# Altium PCB 01SignalDetect.PcbDoc
Units mil, origin at the board's own origin, x right, y up, seen from the top; angles counter-clockwise.
Board outline 5526.23 x 3781.16 mil, 2 copper layers (Top Layer, Bottom Layer); 124 components, 62 nets, 362 pads, 129 vias.
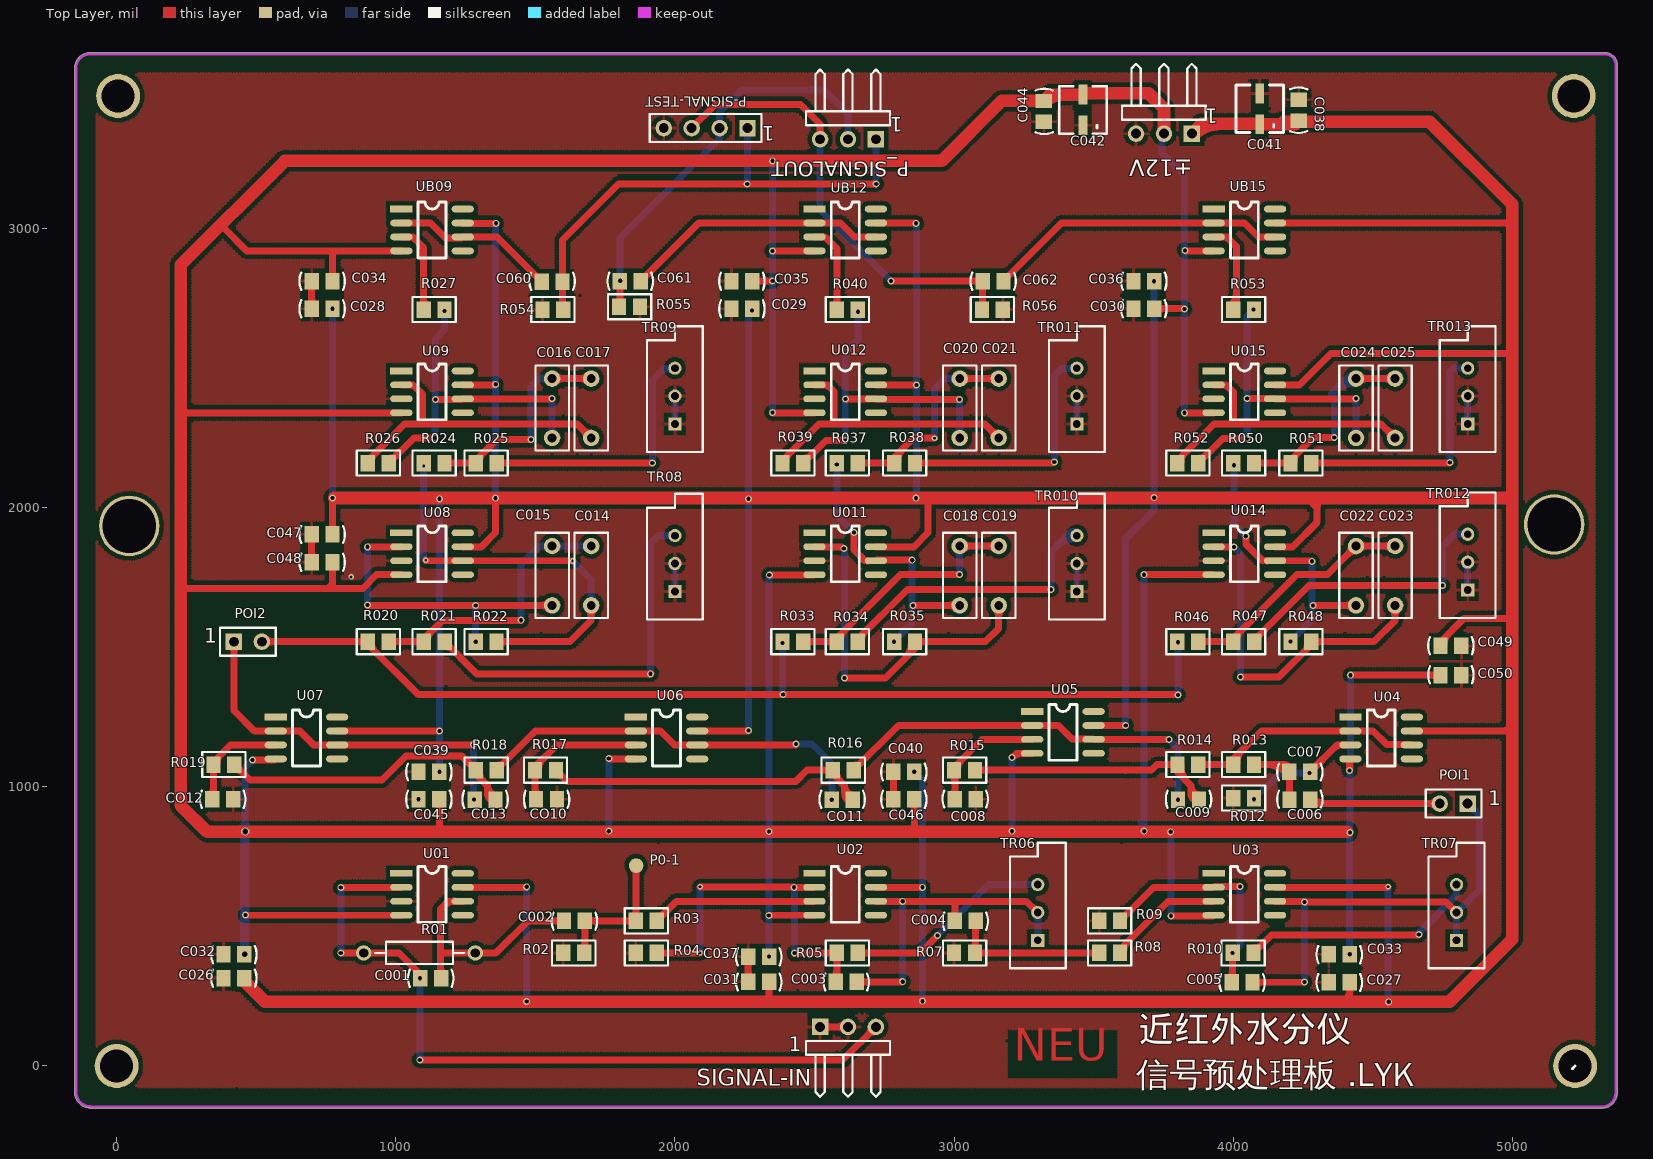
[diagram p0: Top Layer view]
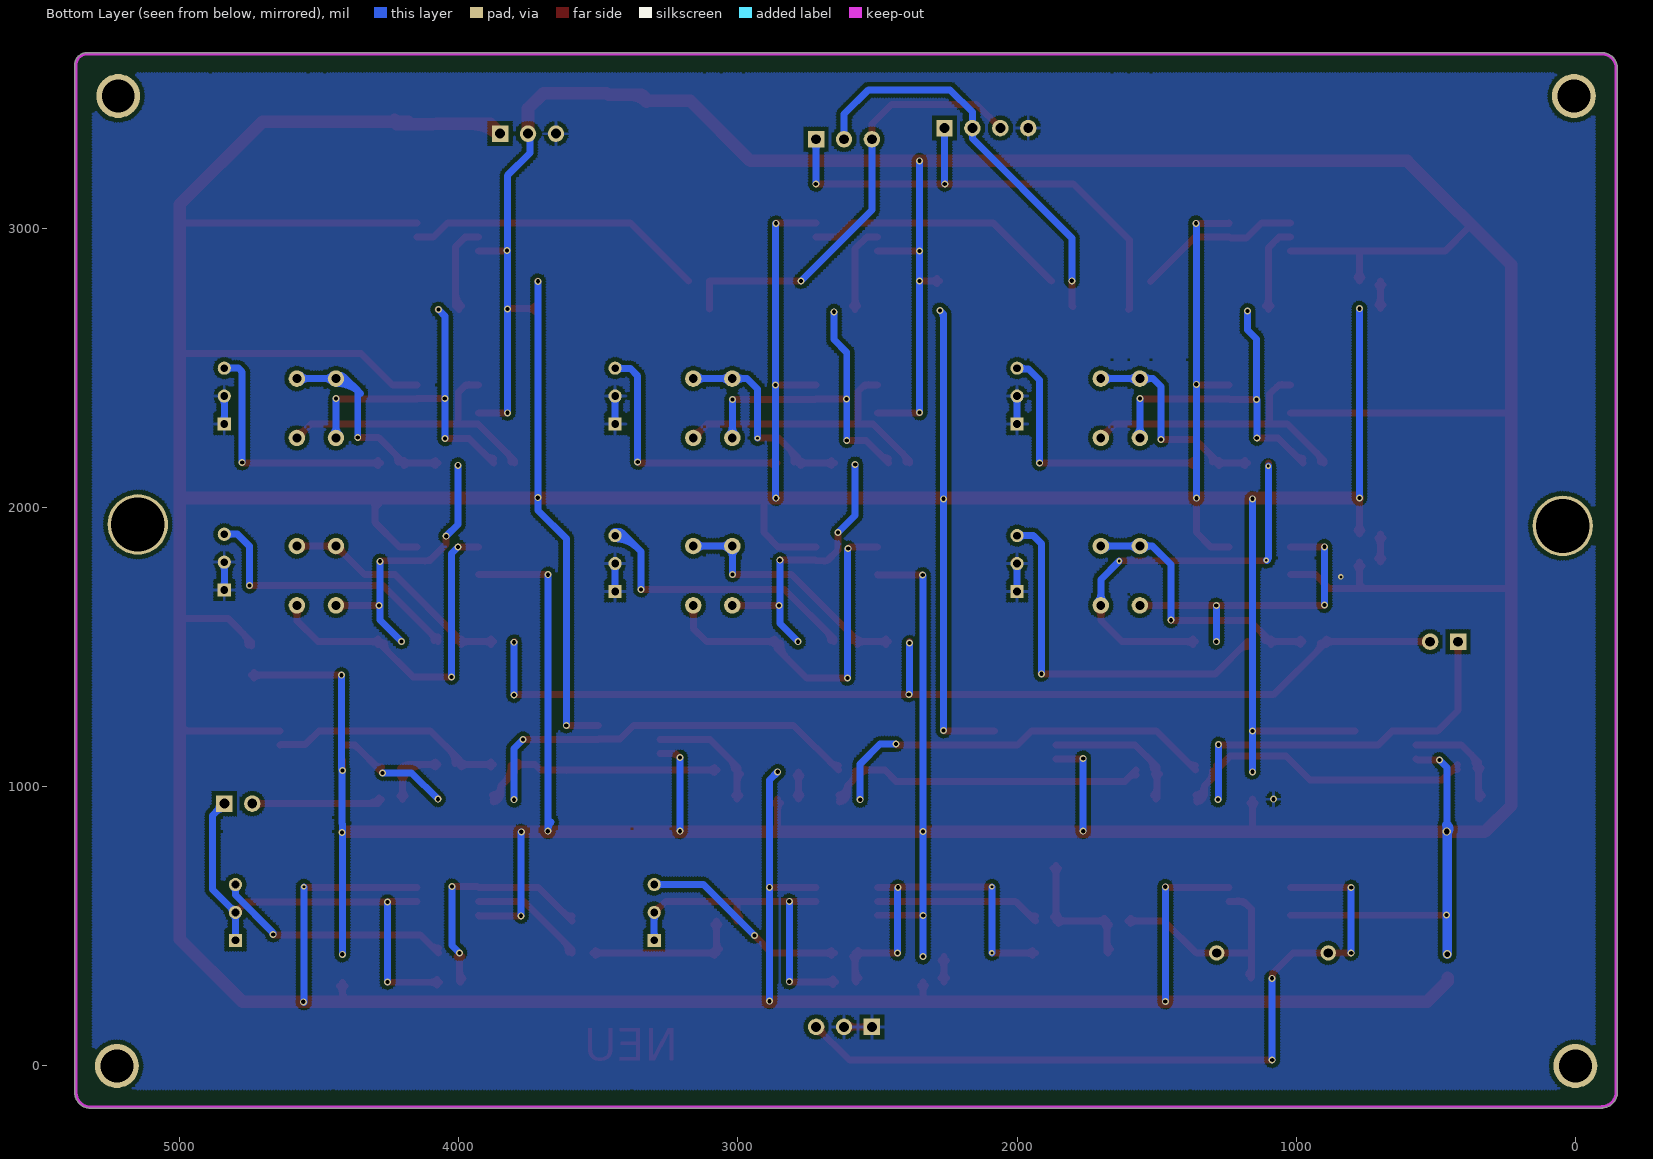
[diagram p1: Bottom Layer view, seen from below]

## Layer stack, top to bottom
Top Layer: signal copper 1.4
Dielectric: dielectric 12.6, FR-4, Dk 4.8
Bottom Layer: signal copper 1.4

## Board outline
-149.99,-100.25 ccw(c-95,-94.75) -98.28,-149.92 ccw(c-95,-146.13) -95,-151.14 5325,-151.14 ccw(c5325,-146.13) 5325.55,-151.11 ccw(c5320,-96.13) 5375.27,-96.13 ccw(c5370.25,-96.13) 5375.27,-96.03 5375.96,3589.41 ccw(c5370.95,3589.49) 5375.96,3589.49 ccw(c5370.95,3589.49) 5375.94,3589.99 ccw(c5331.71,3585.57) 5331.71,3630.02 -100,3630.02 ccw(c-100,3625) -100.5,3629.99 ccw(c-95,3575) -150.26,3575 ccw(c-145.25,3575) -150.02,3573.44 -150.02,-99.75 ccw(c-145,-99.75)

## Design rules (kind name [scope] priority, off if disabled: settings)
Clearance Clearance_2 [InNamedPolygon('Top Layer-b')] p1: gap=15
Clearance Clearance_1 [InNamedPolygon('Top Layer-r')] p2: gap=15
Clearance [All] p3: gap=8
HoleSize [All] p1: absolutevalues=TRUE maxlimit=500 minlimit=1 maxpercent=80.000 minpercent=20.000
HoleToHoleClearance [All] p1: gap=8 allowstackedmicrovias=TRUE
MinimumSolderMaskSliver [All] p1: minsoldermaskwidth=8
PolygonConnect [All] p1: connectstyle=Relief reliefconductorwidth=10 reliefentries=4 polygonreliefangle="90 Angle"
RoutingCorners [All] p1: cornerstyle=45-Degree minsetback=10 maxsetback=100
RoutingVias [All] p1: holewidth=10 width=20 viastyle="Through Hole" minholewidth=8 minwidth=10 maxholewidth=50 maxwidth=80
SilkToSilkClearance [All] p1: silktosilkclearance=8
SilkscreenOverComponentPads [All] p1: minsilkscreentomaskgap=5
SolderMaskExpansion [All] p1: expansion=4
TestPointUsage [All] p1: valid=0 allowmultiple=FALSE
Testpoint [All] p1: side=15 testpointundercomponent=TRUE minsize=40 maxsize=100 preferedsize=60 minholesize=0 maxholesize=40 preferedholesize=32 testpointgrid=1 style=1023 order=0-112345678
Width [All] p1: maxlimit=100 minlimit=10 preferedwidth=20
18 further rules are at their usual default settings.

## Components (designator, comment, footprint, x,y, rotation, side; value= is the part's Value field where it differs from the comment)
C001 "Cap" CC0805 1125,315 r180 top
C002 "Cap" CC0805 1640,520 r180 top
C003 "Cap" CC0805 2613.62,301.72 r180 top
C004 "Cap" CC0805 3040,520 r180 top
C005 "Cap" CC0805 4031.78,300 r180 top
C006 "Cap" CC0805 4238.78,954 r0 top
C007 "Cap" CC0805 4238.62,1054 r180 top
C008 "Cap" CC0805 3040,955.72 r0 top
C009 "Cap" CC0805 3840,954 r0 top
C013 "Cap" CC0805 1320,954 r0 top
C014 "Cap" 校正电容 1700,1650 r90 top
C015 "Cap" 校正电容 1560,1650 r90 top
C016 "Cap" 校正电容 1560,2250 r90 top
C017 "Cap" 校正电容 1700,2250 r90 top
C018 "Cap" 校正电容 3020,1650 r90 top
C019 "Cap" 校正电容 3160,1650 r90 top
C020 "Cap" 校正电容 3020,2250 r90 top
C021 "Cap" 校正电容 3160,2250 r90 top
C022 "Cap" 校正电容 4440,1650 r90 top
C023 "Cap" 校正电容 4580,1650 r90 top
C024 "Cap" 校正电容 4440,2250 r90 top
C025 "Cap" 校正电容 4580,2250 r90 top
C026 "Cap" CC0805 420,315 r180 top
C027 "Cap" CC0805 4380,300 r180 top
C028 "Cap" CC0805 736,2713 r180 top
C029 "Cap" CC0805 2240,2713 r180 top
C030 "Cap" CC0805 3680,2812 r180 top
C031 "Cap" CC0805 2300,301.72 r180 top
C032 "Cap" CC0805 420,400 r180 top
C033 "Cap" CC0805 4380,400 r180 top
C034 "Cap" CC0805 736,2812 r180 top
C035 "Cap" CC0805 2240,2812 r180 top
C036 "Cap" CC0805 3680,2713 r180 top
C037 "Cap" CC0805 2300,391.72 r180 top
C038 "Cap" CC0805 4235,3424.17 r90 top
C039 "Cap" CC0805 1118.62,1054 r180 top
C040 "Cap" CC0805 2820,1054 r180 top
C041 "Cap Pol1" "4*4.5 贴片电解电容" 4095,3484 r0 top
C042 "Cap Pol1" "4*4.5 贴片电解电容" 3462,3480 r0 top
C044 "Cap" CC0805 3322,3420 r270 top
C045 "Cap" CC0805 1118.62,955.72 r180 top
C046 "Cap" CC0805 2820,955.72 r180 top
C047 "Cap" CC0805 736,1905 r180 top
C048 "Cap" CC0805 736.17,1805 r180 top
C049 "Cap" CC0805 4780,1505 r0 top
C050 "Cap" CC0805 4780,1400 r0 top
C060 "Cap" CC0805 1560,2810.28 r0 top
C061 "Cap" CC0805 1840,2812 r180 top
C062 "Cap" CC0805 3140,2812 r180 top
CO10 "Cap" CC0805 1540,955.72 r180 top
CO11 "Cap" CC0805 2599.24,954 r0 top
CO12 "Cap" CC0805 380,955.72 r180 top
P0-1 "测试点" Text_PAD 1860,720 r90 top
P-SIGNAL-TEST "信号处理输出测试点" HDR1X4 2260,3360 r180 top
P_SIGNALOUT "信号处理输出" HDR1X3H 2720,3320 r180 top
POI1 "FAMP_OUT-FILTER_IN跳针" HDR1X2 4840,940 r180 top
POI2 "FILTER_OUT-PART_IN跳针" HDR1X2 420,1520 r0 top
R01 "Res2" AXIAL-0.4 1085,405 r0 top
R02 "Res2" 0805 1600,405 r0 top
R03 "Res2" 0805 1860,520 r0 top
R04 "Res2" 0805 1860,405 r0 top
R05 "Res2" 0805 2580,405 r0 top
R07 "Res2" 0805 3000,405 r0 top
R08 "Res2" 0805 3520,405 r0 top
R09 "Res2" 0805 3520,520 r0 top
R010 "Res2" 0805 3998,405 r0 top
R012 "Res2" 0805 4000,960 r0 top
R013 "Res2" 0805 4000,1080 r0 top
R014 "Res2" 0805 3875,1080 r180 top
R015 "Res2" 0805 3000,1060 r0 top
R016 "Res2" 0805 2640.46,1060 r180 top
R017 "Res2" 0805 1573.78,1060 r180 top
R018 "Res2" 0805 1361.22,1060 r180 top
R019 "Res2" 0805 421.38,1080 r180 top
R020 "Res2" 0805 900,1520 r0 top
R021 "Res2" 0805 1175,1520 r180 top
R022 "Res2" 0805 1286.22,1520 r0 top
R024 "Res2" 0805 1100,2160 r0 top
R025 "Res2" 0805 1361.22,2160 r180 top
R026 "Res2" 0805 900,2160 r0 top
R027 "Res2" 0805 1100,2710 r0 top
R033 "Res2" 0805 2385,1520 r0 top
R034 "Res2" 0805 2655,1520 r180 top
R035 "Res2" 0805 2860,1520 r180 top
R037 "Res2" 0805 2580,2160 r0 top
R038 "Res2" 0805 2860,2160 r180 top
R039 "Res2" 0805 2385,2160 r0 top
R040 "Res2" 0805 2580,2710 r0 top
R046 "Res2" 0805 3800,1520 r0 top
R047 "Res2" 0805 4075,1520 r180 top
R048 "Res2" 0805 4280,1520 r180 top
R050 "Res2" 0805 4000,2160 r0 top
R051 "Res2" 0805 4280,2160 r180 top
R052 "Res2" 0805 3800,2160 r0 top
R053 "Res2" 0805 4000,2710 r0 top
R054 "Res2" 0805 1600,2710 r180 top
R055 "Res2" 0805 1800,2720 r0 top
R056 "Res2" 0805 3100,2710 r0 top
SIGNAL-IN "探测器信号输入" HDR1X3H 2520,140 r0 top
TR06 "RPot" VR5 3300.06,550 r90 top
TR07 "RPot" VR5 4800.06,550 r90 top
TR08 "RPot" VR5 2000,1800 r90 top
TR09 "RPot" VR5 2000,2400 r90 top
TR010 "RPot" VR5 3440.06,1800 r90 top
TR011 "RPot" VR5 3440,2400 r90 top
TR012 "RPot" VR5 4840,1805 r90 top
TR013 "RPot" VR5 4840,2400 r90 top
U01 "AD8671" SO-8-N 1020,690 r0 top
U02 "OP37EZ" SO-8-N 2500,690 r0 top
U03 "OP37EZ" SO-8-N 3930,690 r0 top
U04 "OP37EZ" SO-8-N 4420,1250 r0 top
U05 "OP37EZ" SO-8-N 3280,1270 r0 top
U06 "OP37EZ" SO-8-N 1860,1250 r0 top
U07 "OP37EZ" SO-8-N 570,1250 r0 top
U08 "OP37EZ" SO-8-N 1020,1910 r0 top
U09 "OP37EZ" SO-8-N 1020,2490 r0 top
U011 "OP37EZ" SO-8-N 2500,1910 r0 top
U012 "OP37EZ" SO-8-N 2500,2490 r0 top
U014 "OP37EZ" SO-8-N 3930,1910 r0 top
U015 "OP37EZ" SO-8-N 3930,2490 r0 top
UB09 "OP37EZ" SO-8-N 1020,3070 r0 top
UB12 "OP37EZ" SO-8-N 2500,3070 r0 top
UB15 "OP37EZ" SO-8-N 3930,3070 r0 top
±12V "信号处理板连接" HDR1X3H 3852,3340 r180 top

## Footprints (in the part's own frame and the unit in brackets; to place one, negate y for a bottom-side part, rotate by r counter-clockwise, add the part's x,y. Pads: shape width x height; smd on the part's side, far side on the other; paste and mask are expansions set on the pad)
"4*4.5 贴片电解电容" [mm] "10uf-16V / 25V铝电解电容"
  rect 0.8x1.8 smd: 1(0,-2.794) 2(0,0)
  silkscreen extent -2.16,-3.56 2.16,0.76
0805 [mm]
  rect 1.3x1.5 smd: 1(0,0) 2(1.9,0)
  silkscreen extent -1.02,-1.14 2.92,1.14
AXIAL-0.4 [mm] "Resistor; 2 Leads"
  round 1.4 hole 0.85: 1(-5.08,0) 2(5.08,0)
  silkscreen extent -4.06,-1.02 4.06,1.02
CC0805 [mm] "贴片电容"
  rect 1.3x1.5 smd: 1(-0.95,0) 2(0.95,0)
  silkscreen extent -2.06,-0.76 2.06,0.81, body extent -1.27,-0.64 1.27,0.64, height 0.9
HDR1X2 [mm] "Connector; Header; 2 Position"
  rect 1.5x1.5 hole 0.9: 1(0,0)
  round 1.5 hole 0.9: 2(2.54,0)
  silkscreen extent -1.27,-1.27 3.81,1.27
HDR1X3H [mm] "Connector; Header; 3 Position; Right Angle"
  rect 1.5x1.5 hole 0.9: 1(0,0)
  round 1.5 hole 0.9: 2(2.54,0) 3(5.08,0)
  silkscreen extent -1.27,-6.35 6.35,-1.27
HDR1X4 [mm] "Connector; Header; 4 Position"
  rect 1.5x1.5 hole 0.9: 1(0,0)
  round 1.5 hole 0.9: 2(2.54,0) 3(5.08,0) 4(7.62,0)
  silkscreen extent -1.27,-1.27 8.89,1.27
SO-8-N [mil]
  rect 80x24 smd: 1(0,0)
  oval 80x24 smd: 2(0,-50) 3(0,-100) 4(0,-150) 5(220,-150) 6(220,-100) 7(220,-50) 8(220,0)
  silkscreen extent 60,-175 160,25
Text_PAD [mil]
  round 52.13 smd: 0(-2,-1)
VR5 [mm] "Potentiometer; 3 Leads"
  rect 1.2x1.2 hole 0.7: 1(-2.54,0)
  round 1.2 hole 0.7: 2(0,0) 3(2.54,0)
  silkscreen extent -5.08,-2.54 6.35,2.54
校正电容 [mm]
  round 1.5 hole 0.8: 1(0,0) 2(5.4,0)
  silkscreen extent -1.14,-1.52 6.6,1.52

## Part data
C001 C002 C003 C004 C005 C006 C007 C008 C009 C013 C014 C015 C016 C017 C018 C019 C020 C021 C022 C023 C024 C025 C026 C027 C028 C029 C030 C031 C032 C033 C034 C035 C036 C037 C038 C039 C040 C044 C045 C046 C047 C048 C049 C050 C060 C061 C062 CO10 CO11 CO12: "Capacitor"
C041 C042: "Polarized Capacitor (Radial)"
P-SIGNAL-TEST: library part "Header 4", "Header, 4-Pin"
P_SIGNALOUT SIGNAL-IN ±12V: library part "Header 3H", "Header, 3-Pin, Right Angle"
POI1 POI2: library part "Header 2", "Header, 2-Pin"
R01 R02 R03 R04 R05 R07 R08 R09 R010 R012 R013 R014 R015 R016 R017 R018 R019 R020 R021 R022 R024 R025 R026 R027 R033 R034 R035 R037 R038 R039 R040 R046 R047 R048 R050 R051 R052 R053 R054 R055 R056: "Resistor"
TR06 TR07 TR08 TR09 TR010 TR011 TR012 TR013: "Potentiometer"
U01: library part OP27FJ, "Low-Noise, Precision Operational Amplifier"
U02 U03 U04 U05 U06 U07 U08 U09 U011 U012 U014 U015 UB09 UB12 UB15: "Low-Noise, Precision, High-Speed Operational Amplifier (Avcl >= 5)"

## Free pads (board coordinates)
  round 157.48 hole 118.11: 0(0,0) 1(5,3475) 2(5225,0) 3(5220,3475)
  round 216.54 hole 192.91: 4(45,1935) 5(5150,1940)

## Via types
v1: diameter 25, hole 15, Top Layer to Bottom Layer, 119 vias
v2: diameter 20, hole 10, Top Layer to Bottom Layer, 8 vias
v3: diameter 30, hole 20, Top Layer to Bottom Layer, 2 vias

## Nets (pads, with @x,y where several pads share a name; then routed paths per layer and width w, separated by ;. In a path a pad name is that pad's centre, name@x,y a point inside that pad or via, vN(x,y) a via of type N, cw(c..) or ccw(c..) an arc to the next point about the centre after c; other vN are vias at no path point)
AGND: C008.2 C026.2 C027.2 C028.2 C029.2 C030.2 C031.2 C032.2 C033.2 C034.2 C035.2 C036.2 C037.2 C038.2 C039.2 C040.2 C041.2 C042.1 C044.2 C045.2 C046.2 C047.2 C048.2 C049.2 C050.2 CO10.1 CO12.1 P-SIGNAL-TEST.4 R02.1 R04.1 R07.1 R09.1 R012.1 R054.2 R055.2 R056.2 SIGNAL-IN.1 SIGNAL-IN.2 TR08.1 TR08.2 TR09.1 TR09.2 TR010.1 TR010.2 TR011.1 TR011.2 TR012.1 TR012.2 TR013.1 TR013.2 U01.3 U08.3 U09.3 U011.3 U012.3 U014.3 U015.3 ±12V.3 | length 2141.9
  Top Layer w10: v2(840,1752) v2@840,1760
  Top Layer w25: C047.2@689.34,1891.81 cw(c666.99,1869.46) 698.6,1869.46 cw(c730.2,1869.46) C047.2@707.85,1891.81 ; C028.2@689.34,2726.19 ccw(c666.99,2748.54) 698.6,2748.54 ccw(c730.2,2748.54) C028.2@707.85,2726.19 ; C034.2@689.34,2798.81 cw(c666.99,2776.46) 698.6,2776.46 cw(c730.2,2776.46) C034.2@707.85,2798.81 ; C048.2@689.51,1818.19 ccw(c667.57,1840.14) 698.6,1840.14 ; 698.6,1840.94 ccw(c730.77,1840.94) C048.2@708.02,1818.19 ; C047.2 698.6,1805.17 C048.2 ; C028.2 C034.2 ; TR08.2 TR08.2@2010,1810 ; C031.2@2253.34,314.91 ccw(c2230.99,337.26) 2262.6,337.26 ccw(c2294.2,337.26) C031.2@2271.85,314.91 ; C037.2@2253.34,378.53 cw(c2230.99,356.18) 2262.6,356.18 cw(c2294.2,356.18) C037.2@2271.85,378.53 ; C031.2 C037.2 ; SIGNAL-IN.1 SIGNAL-IN.2 ; SIGNAL-IN.1@2532.04,127.96 cw(c2561.11,98.89) 2561.11,140 cw(c2561.11,181.11) SIGNAL-IN.1@2532.04,152.04 ; SIGNAL-IN.2@2607.96,127.96 ccw(c2578.89,98.89) 2578.89,140 ccw(c2578.89,181.11) SIGNAL-IN.2@2607.96,152.04 ; C046.2@2773.34,968.91 ccw(c2750.99,991.26) 2782.6,991.26 ccw(c2814.2,991.26) C046.2@2791.85,968.91 ; C040.2@2773.34,1040.81 cw(c2750.99,1018.46) 2782.6,1018.46 cw(c2814.2,1018.46) C040.2@2791.85,1040.81 ; C046.2 C040.2
  Bottom Layer w25: TR08.1@1992.14,1707.86 ccw(c1973.15,1726.85) 2000,1726.85 ccw(c2026.85,1726.85) TR08.1@2007.87,1707.86 ; TR08.2@1992.14,1792.14 cw(c1973.15,1773.15) 2000,1773.15 cw(c2026.85,1773.15) TR08.2@2007.87,1792.14 ; TR09.1@1992.14,2307.86 ccw(c1973.15,2326.85) 2000,2326.85 ccw(c2026.85,2326.85) TR09.1@2007.87,2307.86 ; TR09.2@1992.14,2392.14 cw(c1973.15,2373.15) 2000,2373.15 cw(c2026.85,2373.15) TR09.2@2007.87,2392.14 ; TR08.1 TR08.2 ; TR09.1 TR09.2 ; TR011.1@3432.14,2307.86 ccw(c3413.15,2326.85) 3440,2326.85 ccw(c3466.85,2326.85) TR011.1@3447.87,2307.86 ; TR011.2@3432.14,2392.14 cw(c3413.15,2373.15) 3440,2373.15 cw(c3466.85,2373.15) TR011.2@3447.87,2392.14 ; TR010.1@3432.2,1707.86 ccw(c3413.21,1726.85) 3440.06,1726.85 ccw(c3466.91,1726.85) TR010.1@3447.93,1707.86 ; TR010.2@3432.2,1792.14 cw(c3413.21,1773.15) 3440.06,1773.15 cw(c3466.91,1773.15) TR010.2@3447.93,1792.14 ; TR011.1 TR011.2 ; TR010.1 TR010.2 ; TR012.1@4832.14,1712.86 ccw(c4813.15,1731.85) 4840,1731.85 ccw(c4866.85,1731.85) TR012.1@4847.87,1712.86 ; TR012.2@4832.14,1797.14 cw(c4813.15,1778.15) 4840,1778.15 cw(c4866.85,1778.15) TR012.2@4847.87,1797.14 ; TR013.1@4832.14,2307.86 ccw(c4813.15,2326.85) 4840,2326.85 ccw(c4866.85,2326.85) TR013.1@4847.87,2307.86 ; TR013.2@4832.14,2392.14 cw(c4813.15,2373.15) 4840,2373.15 cw(c4866.85,2373.15) TR013.2@4847.87,2392.14 ; TR012.1 TR012.2 ; TR013.1 TR013.2
  other v1: 1081.21,955.72
AV+12: C026.1 C027.1 C028.1 C029.1 C030.1 C031.1 C038.1 C039.1 C040.1 C041.1 C047.1 C049.1 U01.7 U02.7 U03.7 U04.7 U05.7 U06.7 U07.7 U08.7 U09.7 U011.7 U012.7 U014.7 U015.7 UB09.7 UB12.7 UB15.7 ±12V.1 | length 27207.4
  Top Layer w25: C047.1@764.15,1918.19 ccw(c741.8,1940.54) 773.4,1940.54 ccw(c805.01,1940.54) C047.1@782.66,1918.19 ; C047.1 v1@773.4,2028.4 ; U07.7 v1(1157,1200) ; C039.1 v1(1157,1054) ; U01.7 1467,640 v1(1469,642) ; U08.7 1306,1860 1357,1911 v1(1357,2034) v1@1357,2035 ; U09.7 1356,2440 v1(1358,2442) ; UB09.7 1241,3019 v1(1359,3019) ; U06.7 2261,1200 v1(2263,1202) ; 2317,230 2337.4,250.4 C031.1 ; C031.1@2328.15,288.53 cw(c2305.8,266.18) 2337.4,266.18 cw(c2369.01,266.18) C031.1@2346.66,288.53 ; U02.7 v1(2887,640) ; U011.7 2856,1860 2907,1911 2907,2035 ; U012.7 v1(2865,2440) ; UB12.7 2863,3020 v1(2864,3019) ; U05.7 v1(3615,1220) ; v1(3716.4,2811) C030.1 ; U03.7 4553,640 v2(4555,642) ; U014.7 4213,1860 4301,1948 4301,1999 4286,2014 4296,2014 4302,2008 ; U015.7 4238,2440 4351,2553 5000,2553 ; UB15.7 4982,3020 5000,3038 ; C027.1@4408.15,286.81 cw(c4385.8,264.46) 4417.4,264.46 cw(c4449.01,264.46) C027.1@4426.66,286.81 ; 4412,251 4417.4,256.4 C027.1 ; U04.7 4974,1200 4978,1204 ; C049.1 4742.6,1519.6 4826,1603 5000,1603 ; C049.1@4755.69,1508.94 cw(c4813.03,1508.94) 4772.48,1549.48
  Top Layer w45.37: C026.1 457.4,303.6 531,230 2317,230 v1(4557,230) 4775,230 5000,455 5000,1603 5000,2035 ; v1@779.2,2035 1357,2035 2907,2035 5000,2035 ; ±12V.1 3887,3375 4078,3375 ; ±12V.1@3856.84,3335.16 cw(c3953.02,3238.98) 3953.02,3375 ; C041.1 4222.23,3374 C038.1 ; 4182,3382.77 4703.23,3382.77 5000,3086 5000,3038 5000,2553 5000,2035 ; 4193.23,3374 ccw(c4193.23,3424.6) C038.1@4229.01,3388.82 ; 5000,2020 5000,2035
  Bottom Layer w25: v1(773,2035) 773.4,2035.4 v1(773.4,2713) ; v1(1156,2032) 1157,2031 v1(1157,1200) v1(1157,1054) ; v1(1357,2034) 1358,2035 v1(1358,2442) 1358,3018 v1(1359,3019) ; v1(1469,231) v1(1469,642) ; v1(2263,1202) v1(2263,2032) 2263,2694 v1(2276,2707) ccw(c2307.38,2675.62) 2263,2675.62 ; v1(2857.4,1054) 2887,1024.4 v1(2887,640) v1(2887,232) ; v1(2864,2034) 2865,2035 v1(2865,2440) 2865,3018 v1(2864,3019) ; v1(3615,1220) 3615,1889 3716.4,1990.4 v1@3716.4,2036.6 ; v1(3716.4,2811) v1@3716.4,2036.6 ; v1(3717,2036) v1@3716.4,2036.6 ; v2(4555,642) 4555,228 v1(4557,230)
AV-12: C032.1 C033.1 C034.1 C035.1 C036.1 C037.1 C042.2 C044.1 C045.1 C046.1 C048.1 C050.1 U01.4 U02.4 U03.4 U04.4 U05.4 U06.4 U07.4 U08.4 U09.4 U011.4 U012.4 U014.4 U015.4 UB09.4 UB12.4 UB15.4 ±12V.2 | length 22616.4
  Top Layer w25: 229.32,1711 758,1711 ; 229.32,2357 246.32,2340 U09.4 ; 390,2996 466,2920 784,2920 ; C032.1 v3(459,400) ; v1(462,541) 463,540 U01.4 ; v1(487,1096) 566,1096 U07.4 ; C034.1@764.15,2825.19 ccw(c741.8,2847.54) 773.4,2847.54 ccw(c805.01,2847.54) C034.1@782.66,2825.19 ; C048.1@764.31,1791.81 cw(c741.97,1769.46) 773.57,1769.46 cw(c805.17,1769.46) C048.1@782.83,1791.81 ; C034.1 773.4,2909.4 784,2920 ; C048.1 773.57,1726.57 758,1711 ; U08.4 931,1760 882,1711 758,1711 ; UB09.4 784,2920 ; C045.1@1146.76,942.53 cw(c1124.42,920.18) 1156.02,920.18 cw(c1187.62,920.18) C045.1@1165.27,942.53 ; 1156.02,849 C045.1 ; v1(1763,1102) 1765,1100 U06.4 ; C035.1 v1(2349,2812) ; C035.1@2286.66,2802.74 cw(c2309.01,2780.4) 2309.01,2812 cw(c2309.01,2843.6) C035.1@2286.66,2821.26 ; v1(2336.4,539) 2337.4,540 U02.4 ; v1(2338,1759) 2499,1759 U011.4 ; v1(2349,2920) UB12.4 ; v1@2350,2340 U012.4 ; C046.1@2848.15,942.53 cw(c2825.8,920.18) 2857.4,920.18 cw(c2889.01,920.18) C046.1@2866.66,942.53 ; 2857.4,850 C046.1 ; U05.4@3244.21,1120 ccw(c3244.21,1068.79) v1(3208,1105) 3223,1120 U05.4 ; v1(3680,1760) U014.4 ; C036.1 3824,2713 v1(3825,2712) ; C036.1@3726.66,2703.74 cw(c3749.01,2681.4) 3749.01,2713 cw(c3749.01,2744.6) C036.1@3726.66,2722.26 ; v1(3777,538) 3928,538 U03.4 ; v1(3825,2340) U015.4 ; v1(3827,2922) 3829,2920 UB15.4 ; v1(4417,1059) 4417,1097 U04.4 ; v1(4420,1400) C050.1 ; C050.1@4733.34,1390.74 ccw(c4711,1368.4) 4711,1400 ccw(c4711,1431.6) C050.1@4733.34,1409.26
  Top Layer w45.37: C044.1@3327.99,3455.35 cw(c3387.51,3395.83) 3387.51,3480 ; C042.2 3344.6,3480 C044.1 3170.61,3457.4 2956,3242.79 v1(2349,3242.79) 602.79,3242.79 229.32,2869.32 229.32,2357 229.32,1711 229.32,933.68 324,839 v1(3776,839) v1@4409,839 ; C042.2@3472,3485 3697,3485 3752,3430 ±12V.2
  Bottom Layer w25: v1@459,541 v1(462,541) ; 460,863 460,1069 v1(487,1096) ; v1(1763,841) v1(1763,1102) ; v1(2337.4,391.72) 2337.4,861.6 2337,862 2337,1758 v1(2338,1759) ; v1(2349,2341) v1(2349,2812) v1(2349,2920) v1(2349,3242.79) ; v1(3208,841) v1(3208,1105) ; 3669.5,873.5 cw(c3641.21,845.2) v1(3681,841) 3681,862 3680,863 v1(3680,1760) ; ±12V.2 3745,3333 3745,3271 3825,3191 v1@3825,2922 ; v1(3776,839) 3777,838 v1(3777,538) ; v1(3825,2340) v1(3825,2712) v1@3825,2922 ; v1(3827,2922) v1@3825,2922 ; v1(4417.4,400) 4417.4,867.4 4418,868 4418,1059 v1(4417,1059) 4420,1062 v1(4420,1400)
  Bottom Layer w35: v3@457.96,838.55 cw(c473.43,849.57) 460,863 459,862 459,541 v3(459,400)
  other v1: 4418,837 2337,840
  other v3: 460,840
FAMP_OUT: C005.1 POI1.1 TR07.1 TR07.2 U03.6 | length 1963.1
  Top Layer w25: C005.1 4254,300 v1(4255,301) ; C005.1@4078.44,290.74 cw(c4100.79,268.4) 4100.79,300 cw(c4100.79,331.6) C005.1@4078.44,309.26 ; U03.6 4252,590 v1(4255,587) 4763.06,587 TR07.2 ; TR07.2@4788.94,550 ccw(c4762.09,550) 4781.08,568.99 ccw(c4800.06,587.97) TR07.2@4800.06,561.12
  Bottom Layer w25: v1(4255,301) v1(4255,587) ; TR07.1@4792.2,457.86 ccw(c4773.21,476.85) 4800.06,476.85 ccw(c4826.91,476.85) TR07.1@4807.93,457.86 ; TR07.2@4792.2,542.14 cw(c4773.21,523.15) 4800.06,523.15 cw(c4826.91,523.15) TR07.2@4807.93,542.14 ; TR07.1 TR07.2 4882,631.94 4882,898 POI1.1 ; TR07.2@4800.06,561.12 ccw(c4800.06,587.97) 4819.05,568.99 ccw(c4838.04,550) TR07.2@4811.19,550 ; POI1.1@4840,922.97 cw(c4840,881.86) 4869.07,910.93 cw(c4898.14,940) POI1.1@4857.03,940
FILTER_IN: C006.2 POI1.2 | length 586
  Top Layer w25: C006.2 4290.19,940 POI1.2 ; C006.2@4285.44,959.32 ccw(c4332.08,1005.96) 4332.08,940 ; POI1.2@4727.96,927.96 ccw(c4698.89,898.89) 4698.89,940 ccw(c4698.89,981.11) POI1.2@4727.96,952.04
FILTER_OUT: C013.1 POI2.1 U07.2 U07.6 | length 1418.3
  Top Layer w25: POI2.1@407.96,1507.96 cw(c378.89,1478.89) 420,1478.89 cw(c461.11,1478.89) POI2.1@432.04,1507.96 ; POI2.1 420,1273 493,1200 U07.2 656,1200 706,1150 U07.6 1278,1150 v1(1278,1151)
  Bottom Layer w25: v1(1278,1151) 1278,957 v1(1280,955)
NetC001_1: C001.1 C002.2 R01.2 U01.6 | length 995.7
  Top Layer w25: 1159.8,356.81 ccw(c1200.28,356.81) C001.1@1171.66,328.19 ; C001.1 1159.8,317.6 1159.8,405 ; 1171.88,573.88 cw(c1212,533.77) U01.6@1212,590.5 ; 1176,578 cw(c1206.9,547.1) U01.6@1212.06,590.5 ; U01.6 1188,590 1159.8,561.8 1159.8,405 ; C002.2@1593.34,510.74 ccw(c1570.99,488.4) 1570.99,520 ccw(c1570.99,551.6) C002.2@1593.34,529.26 ; C002.2 1473,520 1358,405 1159.8,405
NetC001_2: C001.2 R01.1 SIGNAL-IN.3 U01.2 | length 2822.4
  Top Layer w25: v1(803,405) 1011,405 1085,331 1085,317.6 C001.2 ; v1(803,639) 1019,639 U01.2 ; v1(1086,21) 2601,21 SIGNAL-IN.3 ; SIGNAL-IN.3@2702.97,140 cw(c2661.86,140) 2690.93,110.93 cw(c2720,81.86) SIGNAL-IN.3@2720,122.97
  Bottom Layer w25: v1(803,405) v1(803,639) ; v1(1086,21) 1086,313 v1(1087,314)
NetC002_1: C002.1 P0-1.0 R02.2 R03.1 | length 778.9
  Top Layer w25: R02.2@1665.55,418.19 ccw(c1636.93,446.81) 1677.4,446.81 ; C002.1@1668.15,506.81 cw(c1645.8,484.46) 1677.4,484.46 cw(c1709.01,484.46) C002.1@1686.66,506.81 ; R02.2 1677.4,407.6 C002.1 R03.1 1860,717 P0-1.0 ; C002.1@1686.66,510.74 cw(c1709.01,488.4) 1709.01,520 cw(c1709.01,551.6) C002.1@1686.66,529.26 ; R03.1@1850.74,510.74 ccw(c1828.4,488.4) 1828.4,520 ccw(c1828.4,551.6) R03.1@1850.74,529.26 ; R03.1@1850.74,533.19 ccw(c1828.4,555.54) 1860,555.54 ccw(c1891.6,555.54) R03.1@1869.26,533.19 ; P0-1.0@1851.41,708.41 cw(c1830.67,687.67) 1860,687.67 ; 1860,682.84 cw(c1896.16,682.84) P0-1.0@1870.59,708.41
NetC003_1: C003.1 C004.2 TR06.1 TR06.2 U02.6 | length 1449.4
  Top Layer w25: C003.1 2815.72,301.72 v1(2816,302) ; C003.1@2660.27,292.46 cw(c2682.62,270.12) 2682.62,301.72 cw(c2682.62,333.32) C003.1@2660.27,310.98 ; U02.6 3012,590 ; C004.2@2993.34,533.19 ccw(c2970.99,555.54) 3002.6,555.54 ccw(c3034.2,555.54) C004.2@3011.85,533.19 ; C004.2 3002.6,580.6 3012,590 ; TR06.2@3288.94,550 ccw(c3262.09,550) 3281.08,568.99 ccw(c3300.06,587.97) TR06.2@3300.06,561.12 ; TR06.2 3260.06,590 3012,590
  Bottom Layer w25: v1(2816,302) v1(2816,590) ; TR06.1@3292.2,457.86 ccw(c3273.21,476.85) 3300.06,476.85 ccw(c3326.91,476.85) TR06.1@3307.93,457.86 ; TR06.2@3292.2,542.14 cw(c3273.21,523.15) 3300.06,523.15 cw(c3326.91,523.15) TR06.2@3307.93,542.14 ; TR06.1 TR06.2
NetC003_2: C003.2 R04.2 R05.1 U02.2 | length 1476.3
  Top Layer w25: R04.2 v2(2090,405) ; R04.2@1944.06,395.74 cw(c1966.41,373.4) 1966.41,405 cw(c1966.41,436.6) R04.2@1944.06,414.26 ; v2(2090,642) 2425,642 v1(2427,640) U02.2 ; v1@2428.9,402.3 2437,405 R05.1 2580,305.51 C003.2 ; C003.2@2566.96,314.91 ccw(c2535.47,346.4) 2580,346.4 ; R05.1@2570.74,391.81 cw(c2548.4,369.46) 2580,369.46 cw(c2611.6,369.46) R05.1@2589.26,391.81 ; R05.1@2570.74,395.74 ccw(c2548.4,373.4) 2548.4,405 ccw(c2548.4,436.6) R05.1@2570.74,414.26
  Bottom Layer w25: v2(2090,405) v2(2090,642) ; v1(2428,405) v1@2428,638
NetC004_1: C004.1 R07.2 R08.1 | length 742
  Top Layer w25: R07.2@3065.55,418.19 ccw(c3036.93,446.81) 3077.4,446.81 ; C004.1@3068.15,506.81 cw(c3045.8,484.46) 3077.4,484.46 cw(c3109.01,484.46) C004.1@3086.66,506.81 ; C004.1 3077.4,407.6 R07.2 R08.1 ; R07.2@3084.06,395.74 cw(c3106.41,373.4) 3106.41,405 cw(c3106.41,436.6) R07.2@3084.06,414.26 ; R08.1@3510.74,395.74 ccw(c3488.4,373.4) 3488.4,405 ccw(c3488.4,436.6) R08.1@3510.74,414.26
NetC005_2: C005.2 R09.2 R010.1 U03.2 | length 951.9
  Top Layer w25: R09.2 3714.8,640 U03.2 3933,643 v1(4024,643) ; R09.2@3594.8,537.03 ccw(c3594.8,578.14) 3623.87,549.07 ; C005.2@3985.13,313.19 ccw(c3954.04,344.27) 3998,344.27 ; R010.1@3988.74,391.81 cw(c3966.4,369.46) 3998,369.46 cw(c4029.6,369.46) R010.1@4007.26,391.81 ; C005.2 3998,303.62 v1(3998,405)
  Bottom Layer w25: v1(3998,405) 4024,431 v1(4024,643)
NetC006_1: C006.1 C007.2 R013.2 | length 530.8
  Top Layer w25: R013.2 4175.21,1080 C007.2 4201.21,954.17 C006.1 ; R013.2@4084.06,1070.74 cw(c4106.41,1048.4) 4106.41,1080 cw(c4106.41,1111.6) R013.2@4084.06,1089.26 ; 4116.35,1080 cw(c4116.35,973.07) C007.2@4191.96,1048.68 ; C007.2@4176.7,1080 cw(c4176.7,1033.42) C007.2@4209.64,1066.36 ; C007.2@4177.18,1078.03 ccw(c4195.22,1096.07) C007.2@4199.18,1070.87 ; C007.2@4191.96,1040.81 cw(c4169.61,1018.46) 4201.21,1018.46 cw(c4232.82,1018.46) C007.2@4210.47,1040.81 ; C006.1@4192.13,967.19 ccw(c4170.18,989.14) 4201.21,989.14 ; 4201.21,989.94 ccw(c4233.39,989.94) C006.1@4210.64,967.19
NetC007_1: C007.1 R012.2 U04.3 | length 527.3
  Top Layer w25: v1(4074.8,955.8) R012.2 ; C007.1 4372.02,1150 U04.3 ; C007.1@4276.02,1071.03 ccw(c4276.02,1112.14) 4305.09,1083.07 ; 4358.74,1136.72 cw(c4392,1103.47) U04.3@4392,1150.5 ; 4362.03,1140.01 cw(c4387.91,1114.13) U04.3@4392.06,1150.5
  Bottom Layer w25: v1(4074.8,955.8) 4169,1050 v1(4273,1050)
NetC008_1: C008.1 R015.1 U05.3 | length 580.8
  Top Layer w25: R015.1@2990.74,1046.81 cw(c2962.12,1018.19) 3002.6,1018.19 ; C008.1@2993.34,968.91 ccw(c2970.99,991.26) 3002.6,991.26 ccw(c3034.2,991.26) C008.1@3011.85,968.91 ; C008.1 3002.6,1057.4 R015.1 3000,1069.31 3100.69,1170 3201,1170 ; R015.1@3013.09,1063.94 cw(c3057.65,1063.94) 3026.14,1095.45 ; 3173,1170 3201,1170 ; U05.3 3201,1170
NetC009_1: C009.1 R016.1 U05.2 U05.6 | length 1478.3
  Top Layer w25: R016.1 2800.46,1220 U05.2 3374,1220 3422,1172 3498,1172 U05.6 3586.6,1170 v1(3770,1170) ; R016.1@2640.46,1077.03 ccw(c2640.46,1118.14) 2669.53,1089.07
  Bottom Layer w25: v1(3770,1170) 3802.6,1137.4 v1(3802.6,954)
NetC009_2: C009.2 R014.2 R015.2 | length 1182.4
  Top Layer w25: R015.2 3613,1060 ; R015.2@3084.06,1050.74 cw(c3106.41,1028.4) 3106.41,1060 cw(c3106.41,1091.6) R015.2@3084.06,1069.26 ; 3615,1058 3613,1060 ; R014.2@3790.94,1070.74 ccw(c3768.59,1048.4) 3768.59,1080 ccw(c3768.59,1111.6) R014.2@3790.94,1089.26 ; R014.2@3813.28,1075.63 ccw(c3894.08,1072.97) 3836.91,1015.8 ; 3848.69,976.46 ccw(c3879.21,976.46) C009.2@3876.24,946.08 ; 3850.66,980.74 ccw(c3874.36,1004.44) C009.2@3876.55,971 ; C009.2 3848.69,982.71 3848.69,1004.03 ; C009.2@3878.68,970.97 cw(c3881.91,1004.03) 3848.69,1004.03 ; 3613,1060 3707,1060 3727,1080 R014.2 3800.2,1052.52 3848.69,1004.03
NetC013_2: C013.2 R018.2 R019.1 | length 1310.3
  Top Layer w25: R019.1@421.38,1062.97 cw(c421.38,1021.86) 450.45,1050.93 ; R019.1 477.38,1024 950,1024 1036,1110 1236.41,1110 R018.2 1286.41,1046.3 1328.69,1004.03 ; 1257.34,1089.07 ccw(c1286.41,1118.14) R018.2@1286.41,1077.03 ; R018.2@1299.5,1056.06 ccw(c1354.67,1056.06) 1315.66,1017.06 ; 1328.69,976.46 ccw(c1359.21,976.46) C013.2@1356.24,946.08 ; 1330.66,980.74 ccw(c1354.36,1004.44) C013.2@1356.55,971 ; C013.2 1328.69,982.71 1328.69,1004.03 ; C013.2@1358.68,970.97 cw(c1361.91,1004.03) 1328.69,1004.03
NetC014_1: C014.1 R022.2 R024.1 U08.6 | length 1682.8
  Top Layer w25: v2(1100,2149) R024.1 ; v2(1107,1812) 1109,1810 U08.6 1633,1810 v2(1634,1809) ; R022.2 1624,1520 1700,1596 C014.1 ; R022.2@1370.28,1510.74 cw(c1392.62,1488.4) 1392.62,1520 cw(c1392.62,1551.6) R022.2@1370.28,1529.26 ; C014.1@1687.96,1637.96 cw(c1658.89,1608.89) 1700,1608.89 cw(c1741.11,1608.89) C014.1@1712.04,1637.96
  Bottom Layer w25: 1100,1822.86 ccw(c1117.86,1822.86) v2@1105.23,1810.23 ; v2(1100,2149) 1100,1819 v2(1107,1812) ; v2(1634,1809) 1700,1743 C014.1 ; C014.1@1687.96,1662.04 ccw(c1658.89,1691.11) 1700,1691.11 ccw(c1741.11,1691.11) C014.1@1712.04,1662.04
NetC014_2: C014.2 C015.2 R020.2 R021.2 | length 1317.1
  Top Layer w25: R020.2 R021.2 1100.2,1529.31 1166.89,1596 1448,1596 v1(1449,1597) ; R020.2@984.06,1510.74 cw(c1006.41,1488.4) 1006.41,1520 cw(c1006.41,1551.6) R020.2@984.06,1529.26 ; R021.2@1090.94,1510.74 ccw(c1068.59,1488.4) 1068.59,1520 ccw(c1068.59,1551.6) R021.2@1090.94,1529.26 ; R021.2@1113.29,1523.94 cw(c1157.85,1523.94) 1126.34,1555.45
  Bottom Layer w25: v1(1449,1597) 1449,1796 1515.6,1862.6 C015.2 C014.2 ; C015.2@1547.96,1850.56 ccw(c1518.89,1821.49) 1518.89,1862.6 ccw(c1518.89,1903.71) C015.2@1547.96,1874.64 ; C015.2@1572.04,1850.56 cw(c1601.11,1821.49) 1601.11,1862.6 cw(c1601.11,1903.71) C015.2@1572.04,1874.64 ; C014.2@1687.96,1850.56 ccw(c1658.89,1821.49) 1658.89,1862.6 ccw(c1658.89,1903.71) C014.2@1687.96,1874.64
NetC015_1: C015.1 R022.1 U08.2 | length 1188.1
  Top Layer w25: v1(899,1651) 898,1650 C015.1 ; v1(899,1860) U08.2 ; v1@1286,1650 v1(1286.22,1649.78) ; C015.1@1547.96,1637.96 ccw(c1518.89,1608.89) 1518.89,1650 ccw(c1518.89,1691.11) C015.1@1547.96,1662.04
  Bottom Layer w25: v1(899,1651) v1(899,1860) ; v1(1286.22,1520) v1(1286.22,1649.78)
NetC016_1: C016.1 R026.2 R027.2 U09.6 | length 1329.2
  Top Layer w25: R026.2 1064.8,2250 v1(1141,2250) ; R026.2@974.8,2177.03 ccw(c974.8,2218.14) 1003.87,2189.07 ; v1(1142,2388) 1238,2388 U09.6 1559,2390 v1(1560,2391)
  Bottom Layer w25: v1(1141,2250) 1141,2387 v1(1142,2388) 1142,2605 1174,2637 v1(1174,2705) ; C016.1@1547.96,2262.04 ccw(c1518.89,2291.11) 1560,2291.11 ccw(c1601.11,2291.11) C016.1@1572.04,2262.04 ; C016.1 v1(1560,2391)
NetC016_2: C016.2 C017.2 R024.2 R025.2 | length 1364.4
  Top Layer w25: R024.2 R025.2 1286.41,2169.31 1330,2212.89 1330.89,2212.89 1362,2244 v1(1484,2244) ; R024.2@1184.06,2150.74 cw(c1206.41,2128.4) 1206.41,2160 cw(c1206.41,2191.6) R024.2@1184.06,2169.26 ; R025.2@1277.16,2150.74 ccw(c1254.81,2128.4) 1254.81,2160 ccw(c1254.81,2191.6) R025.2@1277.16,2169.26 ; R025.2@1299.5,2163.94 cw(c1344.07,2163.94) 1312.55,2195.45 ; C016.2 C017.2 ; C016.2@1572.04,2450.56 cw(c1601.11,2421.49) 1601.11,2462.6 cw(c1601.11,2503.71) C016.2@1572.04,2474.64 ; C017.2@1687.96,2450.56 ccw(c1658.89,2421.49) 1658.89,2462.6 ccw(c1658.89,2503.71) C017.2@1687.96,2474.64
  Bottom Layer w25: v1(1484,2244) 1484,2434 1512.6,2462.6 C016.2 C017.2 ; C016.2@1547.96,2450.56 ccw(c1518.89,2421.49) 1518.89,2462.6 ccw(c1518.89,2503.71) C016.2@1547.96,2474.64 ; C016.2@1572.04,2450.56 cw(c1601.11,2421.49) 1601.11,2462.6 cw(c1601.11,2503.71) C016.2@1572.04,2474.64 ; C017.2@1687.96,2450.56 ccw(c1658.89,2421.49) 1658.89,2462.6 ccw(c1658.89,2503.71) C017.2@1687.96,2474.64
NetC017_1: C017.1 R026.1 U09.2 | length 1214.1
  Top Layer w25: R026.1 900,2169.31 1030.72,2300.03 1649.97,2300.03 C017.1 ; R026.1@913.09,2163.94 cw(c957.65,2163.94) 926.14,2195.45 ; U09.2 1062,2440 1095,2407 1095,2314 ; U09.2@1047.95,2440.5 cw(c1050.58,2414.58) 1069,2433 ; U09.2@1048,2440.5 cw(c1048,2407.91) 1071.05,2430.95 ; C017.1@1682.97,2250 ccw(c1641.86,2250) 1670.93,2279.07 ccw(c1700,2308.14) C017.1@1700,2267.03
NetC018_1: C018.1 R035.2 R037.1 U011.6 | length 1132.5
  Top Layer w25: v1(2641,1911) 2641,1849 2680,1810 U011.6 2722,1812 v1(2850,1812) ; 2672.37,1817.63 ccw(c2692,1837.26) U011.6@2692,1809.5 ; v1(2853,1650) C018.1 ; C018.1@3007.96,1637.96 ccw(c2978.89,1608.89) 2978.89,1650 ccw(c2978.89,1691.11) C018.1@3007.96,1662.04
  Bottom Layer w25: v1(2580,2155) 2580,1972 v1(2641,1911) ; v1(2785.2,1520) 2850,1584.8 v1@2850,1650 ; v1(2850,1812) v1@2850,1650 ; v1(2853,1650) v1@2850,1650
NetC018_2: C018.2 C019.2 R033.2 R034.2 | length 1522.6
  Top Layer w25: R033.2 R034.2 ; R033.2@2469.06,1510.74 cw(c2491.41,1488.4) 2491.41,1520 cw(c2491.41,1551.6) R033.2@2469.06,1529.26 ; R034.2@2570.94,1510.74 ccw(c2548.59,1488.4) 2548.59,1520 ccw(c2548.59,1551.6) R034.2@2570.94,1529.26 ; R034.2@2580.2,1529.31 R034.2 ; R034.2@2593.29,1523.94 cw(c2647.24,1523.94) 2609.09,1562.09 ; v1(3019,1761) 2808,1761 2580.2,1533.2 R034.2 ; C018.2 C019.2 ; C018.2@3032.04,1850.56 cw(c3061.11,1821.49) 3061.11,1862.6 cw(c3061.11,1903.71) C018.2@3032.04,1874.64 ; C019.2@3147.96,1850.56 ccw(c3118.89,1821.49) 3118.89,1862.6 ccw(c3118.89,1903.71) C019.2@3147.96,1874.64
  Bottom Layer w25: C018.2@3007.96,1850.56 cw(c2981.31,1823.9) 3019,1823.9 ; v1(3019,1761) 3019,1861.6 C018.2 C019.2 ; 3019,1819.08 cw(c3063.52,1819.08) 3032.04,1850.56 cw(c3061.11,1821.49) 3061.11,1862.6 cw(c3061.11,1903.71) C018.2@3032.04,1874.64 ; C019.2@3147.96,1850.56 ccw(c3118.89,1821.49) 3118.89,1862.6 ccw(c3118.89,1903.71) C019.2@3147.96,1874.64
NetC019_1: C019.1 R035.1 U011.2 | length 1487.7
  Top Layer w25: U011.2 2599,1860 v1(2605,1854) ccw(c2590.51,1839.51) 2590.51,1860 ; v1(2608,1390) 2754,1390 2860,1496 R035.1 3112,1520 3160,1568 C019.1 ; 2823.47,1459.47 ccw(c2766.87,1516.06) R035.1@2846.91,1516.06 ; R035.1@2869.26,1510.74 cw(c2891.6,1488.4) 2891.6,1520 cw(c2891.6,1551.6) R035.1@2869.26,1529.26 ; C019.1@3147.96,1637.96 cw(c3118.89,1608.89) 3160,1608.89 cw(c3201.11,1608.89) C019.1@3172.04,1637.96
  Bottom Layer w25: v1(2605,1854) 2608,1851 v1(2608,1390)
NetC020_1: C020.1 R039.2 R040.2 U012.6 | length 1309.7
  Top Layer w25: R039.2 2541,2241.2 v1(2610.2,2241.2) ; R039.2@2459.8,2177.03 ccw(c2459.8,2218.14) 2488.87,2189.07 ; v1(2611.2,2390) U012.6 2722,2388 v1(3020,2388)
  Bottom Layer w25: v1(2610.2,2241.2) v1@2610.2,2389 ; v1(2611.2,2390) v1@2610.2,2389 ; v1(2656,2702) 2656,2602 2610.2,2556.2 v1@2610.2,2389 ; C020.1@3007.96,2262.04 ccw(c2978.89,2291.11) 3020,2291.11 ccw(c3061.11,2291.11) C020.1@3032.04,2262.04 ; C020.1 v1(3020,2388)
NetC020_2: C020.2 C021.2 R037.2 R038.2 | length 1363.3
  Top Layer w25: R037.2 R038.2 2785.2,2180.2 2854,2249 v2(2930,2249) ; R037.2@2664.06,2150.74 cw(c2686.41,2128.4) 2686.41,2160 cw(c2686.41,2191.6) R037.2@2664.06,2169.26 ; R038.2@2775.94,2150.74 ccw(c2753.59,2128.4) 2753.59,2160 ccw(c2753.59,2191.6) R038.2@2775.94,2169.26 ; R038.2@2798.29,2163.94 cw(c2869.14,2163.94) 2819.04,2214.04 ; C020.2 C021.2 ; C020.2@3032.04,2450.56 cw(c3061.11,2421.49) 3061.11,2462.6 cw(c3061.11,2503.71) C020.2@3032.04,2474.64 ; C021.2@3147.96,2450.56 ccw(c3118.89,2421.49) 3118.89,2462.6 ccw(c3118.89,2503.71) C021.2@3147.96,2474.64
  Bottom Layer w25: v2(2930,2249) 2930,2425 2967.6,2462.6 C020.2 C021.2 ; C020.2@3007.96,2450.56 ccw(c2978.89,2421.49) 2978.89,2462.6 ccw(c2978.89,2503.71) C020.2@3007.96,2474.64 ; C020.2@3032.04,2450.56 cw(c3061.11,2421.49) 3061.11,2462.6 cw(c3061.11,2503.71) C020.2@3032.04,2474.64 ; C021.2@3147.96,2450.56 ccw(c3118.89,2421.49) 3118.89,2462.6 ccw(c3118.89,2503.71) C021.2@3147.96,2474.64
NetC021_1: C021.1 R039.1 U012.2 | length 1217.5
  Top Layer w25: R039.1 2385,2169.31 2515.72,2300.03 2570,2300.03 ; R039.1@2398.09,2163.94 cw(c2442.65,2163.94) 2411.14,2195.45 ; U012.2 2546,2440 2570,2416 2570,2300.03 ; U012.2@2527.94,2440.5 cw(c2531.59,2407.59) 2555,2431 ; U012.2@2528,2440.5 cw(c2528,2398.25) 2557.87,2428.13 ; C021.1@3142.97,2250 ccw(c3101.86,2250) 3130.93,2279.07 ccw(c3160,2308.14) C021.1@3160,2267.03 ; C021.1 3109.97,2300.03 2570,2300.03
NetC022_1: C022.1 R048.2 R050.1 U014.6 | length 1135.7
  Top Layer w25: v1(4045,1898) 4045,1870 4105,1810 U014.6 4280,1810 v1(4282,1808) ; 4093.83,1821.17 ccw(c4122,1849.33) U014.6@4122,1809.5 ; R048.2 v1(4205.2,1521.2) ; v1(4286,1650) C022.1 ; C022.1@4427.96,1637.96 ccw(c4398.89,1608.89) 4398.89,1650 ccw(c4398.89,1691.11) C022.1@4427.96,1662.04
  Bottom Layer w25: v1(4003,2152) 4003,1940 v1(4045,1898) ; v1(4205.2,1521.2) 4282,1598 v1@4282,1650 ; v1(4282,1808) v1@4282,1650 ; v1(4286,1650) v1@4282,1650
NetC022_2: C022.2 C023.2 R046.2 R047.2 | length 1187.7
  Top Layer w25: R046.2 R047.2 4000.2,1532.2 4228,1760 4337.4,1760 C022.2 C023.2 ; R046.2@3884.06,1510.74 cw(c3906.41,1488.4) 3906.41,1520 cw(c3906.41,1551.6) R046.2@3884.06,1529.26 ; R047.2@3990.94,1510.74 ccw(c3968.59,1488.4) 3968.59,1520 ccw(c3968.59,1551.6) R047.2@3990.94,1529.26 ; R047.2@4013.29,1523.94 cw(c4064.83,1523.94) 4028.38,1560.38 ; C022.2@4422.97,1862.6 cw(c4381.86,1862.6) 4410.93,1833.53 cw(c4440,1804.46) C022.2@4440,1845.57 ; C022.2@4452.04,1850.56 cw(c4481.11,1821.49) 4481.11,1862.6 cw(c4481.11,1903.71) C022.2@4452.04,1874.64 ; C023.2@4567.96,1850.56 ccw(c4538.89,1821.49) 4538.89,1862.6 ccw(c4538.89,1903.71) C023.2@4567.96,1874.64
NetC023_1: C023.1 R048.1 U014.2 | length 1394.9
  Top Layer w25: U014.2 4002,1860 v1(4003,1859) ; v1(4026,1394) 4163.31,1394 4280,1510.69 R048.1 4505,1520 4580,1595 C023.1 ; 4253.86,1484.55 ccw(c4222.35,1516.06) R048.1@4266.91,1516.06 ; R048.1@4289.26,1510.74 cw(c4311.6,1488.4) 4311.6,1520 cw(c4311.6,1551.6) R048.1@4289.26,1529.26 ; C023.1@4567.96,1637.96 cw(c4538.89,1608.89) 4580,1608.89 cw(c4621.11,1608.89) C023.1@4592.04,1637.96
  Bottom Layer w25: v1(4003,1859) 4026,1836 v1(4026,1394)
NetC024_1: C024.1 R052.2 R053.2 U015.6 | length 1314.5
  Top Layer w25: R052.2 3962.8,2248 v1(4049,2248) ; R052.2@3874.8,2177.03 ccw(c3874.8,2218.14) 3903.87,2189.07 ; v1(4050,2391) 4149,2391 U015.6 4439,2390 v1(4440,2391) ; v1(4073,2710) R053.2
  Bottom Layer w25: v1(4049,2248) v1@4049,2390 ; v1(4050,2391) v1@4049,2390 ; v1(4073,2710) 4049,2686 v1@4049,2390 ; C024.1@4427.96,2262.04 ccw(c4398.89,2291.11) 4440,2291.11 ccw(c4481.11,2291.11) C024.1@4452.04,2262.04 ; C024.1 v1(4440,2391)
NetC024_2: C024.2 C025.2 R050.2 R051.2 | length 1547
  Top Layer w25: R050.2 R051.2 4205.2,2169.31 4286.89,2251 v1(4362,2251) ; R050.2@4084.06,2150.74 cw(c4106.41,2128.4) 4106.41,2160 cw(c4106.41,2191.6) R050.2@4084.06,2169.26 ; R051.2@4195.94,2150.74 ccw(c4173.59,2128.4) 4173.59,2160 ccw(c4173.59,2191.6) R051.2@4195.94,2169.26 ; R051.2@4218.29,2163.94 cw(c4262.85,2163.94) 4231.34,2195.45 ; C024.2 C025.2 ; C024.2@4452.04,2450.56 cw(c4481.11,2421.49) 4481.11,2462.6 cw(c4481.11,2503.71) C024.2@4452.04,2474.64 ; C025.2@4567.96,2450.56 ccw(c4538.89,2421.49) 4538.89,2462.6 ccw(c4538.89,2503.71) C025.2@4567.96,2474.64
  Bottom Layer w25: 4352.2,2409.2 cw(c4440,2321.41) C024.2@4440,2445.57 ; v1(4362,2251) 4362,2419 4405.6,2462.6 ; 4388.4,2445.4 cw(c4411.21,2422.58) C024.2@4430.06,2448.78 ; 4394.88,2451.88 cw(c4440,2406.76) C024.2@4440,2470.57 ; 4409.2,2466.19 cw(c4428.62,2446.77) C024.2@4444.66,2469.07 ; C024.2@4426.46,2452.27 ccw(c4405.6,2436.36) 4405.6,2462.6 ; C024.2@4426.46,2472.92 cw(c4405.6,2488.83) 4405.6,2462.6 ; C024.2@4452.04,2450.56 cw(c4481.11,2421.49) 4481.11,2462.6 cw(c4481.11,2503.71) C024.2@4452.04,2474.64 ; C025.2@4567.96,2450.56 ccw(c4538.89,2421.49) 4538.89,2462.6 ccw(c4538.89,2503.71) C025.2@4567.96,2474.64 ; C025.2 C024.2 4405.6,2462.6
NetC025_1: C025.1 R052.1 U015.2 | length 1244.5
  Top Layer w25: R052.1 3800,2169.31 3930.72,2300.03 4002,2300.03 ; R052.1@3813.09,2163.94 cw(c3857.65,2163.94) 3826.14,2195.45 ; U015.2@3955.3,2440 U015.2 3975,2440 4002,2413 4002,2300.03 ; U015.2@3957.95,2440.5 cw(c3961.34,2409.34) 3983.5,2431.5 ; U015.2@3958,2440.5 cw(c3958,2400.67) 3986.17,2428.83 ; C025.1@4562.97,2250 ccw(c4521.86,2250) 4550.93,2279.07 ccw(c4580,2308.14) C025.1@4580,2267.03 ; C025.1 4529.97,2300.03 4002,2300.03
NetC060_1: C060.1 UB09.2 UB09.6 | length 592.8
  Top Layer w25: UB09.2 1124,3020 1178,2966 1236,2966 UB09.6 1362.88,2970 C060.1
NetC061_1: C061.1 UB12.2 UB12.6 | length 949.5
  Top Layer w25: C061.1 2085.4,3020 UB12.2 2593,3020 2643,2970 UB12.6
NetC062_1: C062.1 UB15.2 UB15.6 | length 1079.5
  Top Layer w25: C062.1 3385.4,3020 UB15.2 4041,3020 4091,2970 UB15.6
NetCO10_2: CO10.2 R017.2 U06.3 | length 635.3
  Top Layer w25: R017.2@1489.72,1046.81 cw(c1467.38,1024.46) 1498.98,1024.46 cw(c1530.58,1024.46) R017.2@1508.24,1046.81 ; 1498.98,1000 ccw(c1542.94,1000) CO10.2@1511.85,968.91 ; CO10.2 1498.98,959.34 R017.2 1498.98,1071.98 1577,1150 U06.3 ; R017.2@1512.07,1063.94 cw(c1563.09,1063.94) 1527.01,1100.01
NetCO11_1: CO11.1 R018.1 U06.2 U06.6 | length 1470.4
  Top Layer w25: R018.1 1501.22,1200 U06.2 1949,1200 1999,1150 U06.6 2431,1150 v1(2434,1153) ; R018.1@1361.22,1077.03 ccw(c1361.22,1118.14) 1390.28,1089.07
  Bottom Layer w25: v1(2434,1153) 2491,1153 2561.84,1082.16 v1(2561.84,954)
NetCO11_2: CO11.2 R016.2 R017.1 | length 1412.3
  Top Layer w25: R017.1@1573.78,1042.97 cw(c1573.78,1001.86) 1602.85,1030.93 ; R017.1 1613.78,1020 2433,1020 ; 2436,1023 2433,1020 ; R016.2@2556.4,1050.74 ccw(c2534.05,1028.4) 2534.05,1060 ccw(c2534.05,1091.6) R016.2@2556.4,1069.26 ; R016.2@2578.74,1056.06 ccw(c2633.91,1056.06) 2594.9,1017.06 ; 2607.93,976.46 ccw(c2638.45,976.46) CO11.2@2635.48,946.08 ; 2609.9,980.74 ccw(c2633.6,1004.44) CO11.2@2635.79,971 ; CO11.2 2607.93,982.71 2607.93,1004.03 ; CO11.2@2637.92,970.97 cw(c2641.15,1004.03) 2607.93,1004.03 ; 2433,1020 2473,1060 R016.2 2565.65,1046.3 2607.93,1004.03
NetCO12_2: CO12.2 R019.2 U07.3 | length 503.9
  Top Layer w25: CO12.2@333.34,968.91 ccw(c301.38,1000.87) 346.58,1000.87 ; R019.2@337.32,1066.81 cw(c314.98,1044.46) 346.58,1044.46 cw(c378.18,1044.46) R019.2@355.84,1066.81 ; CO12.2 346.58,959.7 R019.2 346.58,1089.31 407.27,1150 U07.3 ; R019.2@359.67,1083.94 cw(c404.23,1083.94) 372.72,1115.45
NetR03_2: R03.2 U02.3 | length 626.5
  Top Layer w25: R03.2 2004.8,590 U02.3 ; R03.2@1934.8,537.03 ccw(c1934.8,578.14) 1963.87,549.07
NetR05_2: R05.2 TR06.3 | length 838.6
  Top Layer w25: R05.2 2879,405 v1(2941,467) ; R05.2@2664.06,395.74 cw(c2686.41,373.4) 2686.41,405 cw(c2686.41,436.6) R05.2@2664.06,414.26
  Bottom Layer w25: v1(2941,467) 3124,650 TR06.3 ; TR06.3@3292.2,642.14 ccw(c3273.21,623.15) 3273.21,650 ccw(c3273.21,676.85) TR06.3@3292.2,657.86
NetR08_2: R08.2 U03.3 | length 461
  Top Layer w25: R08.2 3594.8,417.8 3767,590 U03.3 ; R08.2@3607.89,408.94 cw(c3660.9,408.94) 3623.42,446.42
NetR010_2: R010.2 TR07.3 | length 928.9
  Top Layer w25: R010.2 4137,469.2 4663.2,469.2 v1(4665,471) ; R010.2@4072.8,422.03 ccw(c4072.8,463.14) 4101.87,434.07
  Bottom Layer w25: v1(4665,471) 4665,477.33 4800.06,612.4 TR07.3 ; TR07.3@4792.2,642.14 cw(c4773.21,623.15) 4800.06,623.15 cw(c4826.91,623.15) TR07.3@4807.93,642.14
NetR013_1: R013.1 R014.1 U04.2 U04.6 | length 999.2
  Top Layer w25: R014.1 R013.1 4000,1099 4101,1200 U04.2 4501,1200 4550,1151 4639,1151 U04.6 ; R014.1@3884.26,1070.74 cw(c3906.6,1048.4) 3906.6,1080 cw(c3906.6,1111.6) R014.1@3884.26,1089.26 ; R013.1@3990.74,1070.74 ccw(c3968.4,1048.4) 3968.4,1080 ccw(c3968.4,1111.6) R013.1@3990.74,1089.26 ; R013.1@4013.09,1083.94 cw(c4081.06,1083.94) 4033,1132
NetR021_1: R021.1 TR08.3 | length 1427.9
  Top Layer w25: R021.1@1175,1502.97 cw(c1175,1461.86) 1204.07,1490.93 ; R021.1 1290,1405 v1(1913,1405) v1@1915,1407
  Bottom Layer w25: v1(1913,1405) 1913,1871 1942,1900 TR08.3 ; TR08.3@1992.14,1892.14 ccw(c1973.15,1873.15) 1973.15,1900 ccw(c1973.15,1926.85) TR08.3@1992.14,1907.86
NetR025_1: R025.1 TR09.3 | length 1032.4
  Top Layer w25: R025.1 v1(1919,2160) ; R025.1@1370.47,2150.74 cw(c1392.82,2128.4) 1392.82,2160 cw(c1392.82,2191.6) R025.1@1370.47,2169.26
  Bottom Layer w25: v1(1919,2160) 1919,2457 1959,2497 1997,2497 TR09.3 ; 1965.91,2497 ccw(c1965.91,2534.09) TR09.3@1992.14,2507.86
NetR027_1: R027.1 UB09.3 | length 412
  Top Layer w25: UB09.3 1061,2970 1100,2931 R027.1 ; UB09.3@1047.95,2970.5 cw(c1050.33,2946.33) 1067.5,2963.5 ; UB09.3@1048,2970.5 cw(c1048,2940.32) 1069.34,2961.66 ; R027.1@1090.74,2723.19 ccw(c1068.4,2745.54) 1100,2745.54 ccw(c1131.6,2745.54) R027.1@1109.26,2723.19
NetR034_1: R034.1 TR010.3 | length 1327.3
  Top Layer w25: R034.1 2655,1529 2833,1707 v1(3347,1707) ; R034.1@2668.09,1523.94 cw(c2711.92,1523.94) 2680.93,1554.93
  Bottom Layer w25: v1(3347,1707) 3347,1843 3404,1900 TR010.3 ; 3359.51,1855.51 cw(c3440.06,1774.96) TR010.3@3440.06,1888.88 ; 3385.97,1881.97 cw(c3416.16,1851.78) TR010.3@3435.13,1890.03 ; 3402.19,1898.19 cw(c3440.06,1860.32) TR010.3@3440.06,1913.88 ; 3410.59,1906.59 cw(c3432.48,1884.7) TR010.3@3446.23,1912.43 ; TR010.3@3432.2,1892.14 ccw(c3413.21,1873.15) 3413.21,1900 ccw(c3413.21,1926.85) TR010.3@3432.2,1907.86
NetR038_1: R038.1 TR011.3 | length 977.3
  Top Layer w25: R038.1 3355,2160 v1(3359,2164) ; R038.1@2869.26,2150.74 cw(c2891.6,2128.4) 2891.6,2160 cw(c2891.6,2191.6) R038.1@2869.26,2169.26
  Bottom Layer w25: v1(3359,2164) 3359,2472 3385,2498 3438,2498 TR011.3 ; 3408.32,2498 ccw(c3408.32,2531.68) TR011.3@3432.14,2507.86
NetR040_1: R040.1 UB12.3 | length 383.1
  Top Layer w25: UB12.3 2538,2970 2580,2928 R040.1 ; UB12.3@2528,2970.5 cw(c2528,2947.56) 2544.22,2963.78 ; R040.1@2570.74,2723.19 ccw(c2548.4,2745.54) 2580,2745.54 ccw(c2611.6,2745.54) R040.1@2589.26,2723.19
NetR047_1: R047.1 TR012.3 | length 1101.8
  Top Layer w25: R047.1 4075,1525 4271,1721 v1(4750,1721) ; R047.1@4075,1537.03 ccw(c4075,1566.06) R047.1@4095.53,1545.53 ; R047.1@4088.09,1523.94 cw(c4122.26,1523.94) R047.1@4098.1,1548.1
  Bottom Layer w25: v1(4750,1721) 4750,1862 4793,1905 TR012.3 ; TR012.3@4832.14,1897.14 ccw(c4813.15,1878.15) 4813.15,1905 ccw(c4813.15,1931.85) TR012.3@4832.14,1912.86
NetR051_1: R051.1 TR013.3 | length 983
  Top Layer w25: R051.1 4774,2160 v1(4776,2162) ; R051.1@4289.26,2150.74 cw(c4311.6,2128.4) 4311.6,2160 cw(c4311.6,2191.6) R051.1@4289.26,2169.26
  Bottom Layer w25: v1(4776,2162) 4776,2487 4789,2500 TR013.3 ; TR013.3@4832.14,2492.14 ccw(c4813.15,2473.15) 4813.15,2500 ccw(c4813.15,2526.85) TR013.3@4832.14,2507.86
NetR053_1: R053.1 UB15.3 | length 449.8
  Top Layer w25: UB15.3 3977,2970 4012,2935 4012,2722 R053.1 ; UB15.3@3957.94,2970.5 cw(c3961.84,2935.84) 3986.5,2960.5 ; UB15.3@3958,2970.5 cw(c3958,2925.84) 3989.58,2957.42 ; R053.1@3990.74,2723.19 ccw(c3939.43,2774.51) 4012,2774.51
PART_IN: POI2.2 R020.1 R033.1 R046.1 | length 3897.4
  Top Layer w25: POI2.2 R020.1 900,1510.69 1080.69,1330 v1@3802,1330 ; POI2.2@532.04,1507.96 cw(c561.11,1478.89) 561.11,1520 cw(c561.11,1561.11) POI2.2@532.04,1532.04 ; R020.1@890.74,1510.74 ccw(c868.4,1488.4) 868.4,1520 ccw(c868.4,1551.6) R020.1@890.74,1529.26 ; R020.1@913.09,1516.06 ccw(c957.65,1516.06) 926.14,1484.55 ; v1(2385,1515) R033.1 ; R046.1 v1(3802,1518)
  Bottom Layer w25: v1(2385,1515) 2385,1334 v1(2388,1331) ; v1(3802,1329) v1(3802,1518)
SIGNAL_LED17: C060.2 P-SIGNAL-TEST.1 P_SIGNALOUT.1 R054.1 | length 1881.2
  Top Layer w25: R054.1 1597.4,2712.6 C060.2 1597.4,2959.4 1798,3160 v1(2259,3160) v1(2721,3160)
  Bottom Layer w25: v1(2259,3160) 2260,3161 P-SIGNAL-TEST.1 ; P_SIGNALOUT.1@2707.96,3307.96 cw(c2678.89,3278.89) 2720,3278.89 cw(c2761.11,3278.89) P_SIGNALOUT.1@2732.04,3307.96 ; v1@2720,3161 P_SIGNALOUT.1
SIGNAL_LED19: C061.2 P-SIGNAL-TEST.2 P_SIGNALOUT.2 R055.1 | length 1463.7
  Top Layer w25: R055.1 1802.6,2722.6 C061.2
  Bottom Layer w25: v1(1804,2813) 1804,2966 2160,3322 P-SIGNAL-TEST.2 2160,3417 2240,3497 2533,3497 2620,3410 P_SIGNALOUT.2
SIGNAL_LED22: C062.2 P-SIGNAL-TEST.3 P_SIGNALOUT.3 R056.1 | length 1620.4
  Top Layer w25: P-SIGNAL-TEST.3 2145,3445 2450,3445 2520,3375 P_SIGNALOUT.3 ; v1(2774,2812) C062.2 R056.1@3102.6,2712.6
  Bottom Layer w25: P_SIGNALOUT.3 2520,3066 v1(2774,2812)
pads on no net: U01.1 U01.5 U01.8 U02.1 U02.5 U02.8 U03.1 U03.5 U03.8 U04.1 U04.5 U04.8 U05.1 U05.5 U05.8 U06.1 U06.5 U06.8 U07.1 U07.5 U07.8 U08.1 U08.5 U08.8 U09.1 U09.5 U09.8 U011.1 U011.5 U011.8 U012.1 U012.5 U012.8 U014.1 U014.5 U014.8 U015.1 U015.5 U015.8 UB09.1 UB09.5 UB09.8 UB12.1 UB12.5 UB12.8 UB15.1 UB15.5 UB15.8

## Polygon pours and split planes (outlines as drawn)
AGND on Top Layer "Top Layer-b" (hatched 90Degree grid 10 track 10, remove dead copper): -60,3556 5291,3556 5294,3553 5294,-63 5282,-75 -67,-75 -70,-78 -70,3555 -68,3557
AGND on Bottom Layer "Top Layer-b" (hatched 90Degree grid 10 track 10, remove dead copper): -75,3556 5307,3556 5310,3553 5310,-56 5284,-82 -66,-82 -69,-85 -69,3550 -75,3556

## Keep-outs
Keep-Out Layer:
  lines w10: -145.25,3575 cw(c-95,3575) -100,3625 5331.71,3625 cw(c5331.71,3585.57) 5370.95,3589.49 5370.25,-96.13 cw(c5320,-96.13) 5325,-146.13 -95,-146.13 ; -145,3574.75 -145,-99.75 ccw(c-95,-94.75) -95,-145

## Other copper
Top Layer:
  text "NEU" at 3214,-21 h200

## Silkscreen, mask and mechanical layers (free items; w line width, h text height)
Top Overlay:
  lines w10: 5215,-10 5225,0
  text "1" at 3944,3447 h90 r180
  text "1" at 2817,3416 h90 r180
  text "1" at 2357,3385 h90 r180
  text "1" at 313,1498 h90
  text "1" at 4913,917 h90
  text "近红外水分仪" at 3661,56 h160
  text "1" at 2408,35 h90
  text "信号预处理板 .LYK" at 3653,-101 h150